# EAGLE board 29_SmartSensor_HW_PGA ver 0.0.1_PGA460 ver 0.0.6 (EAGLE 9.2.0)
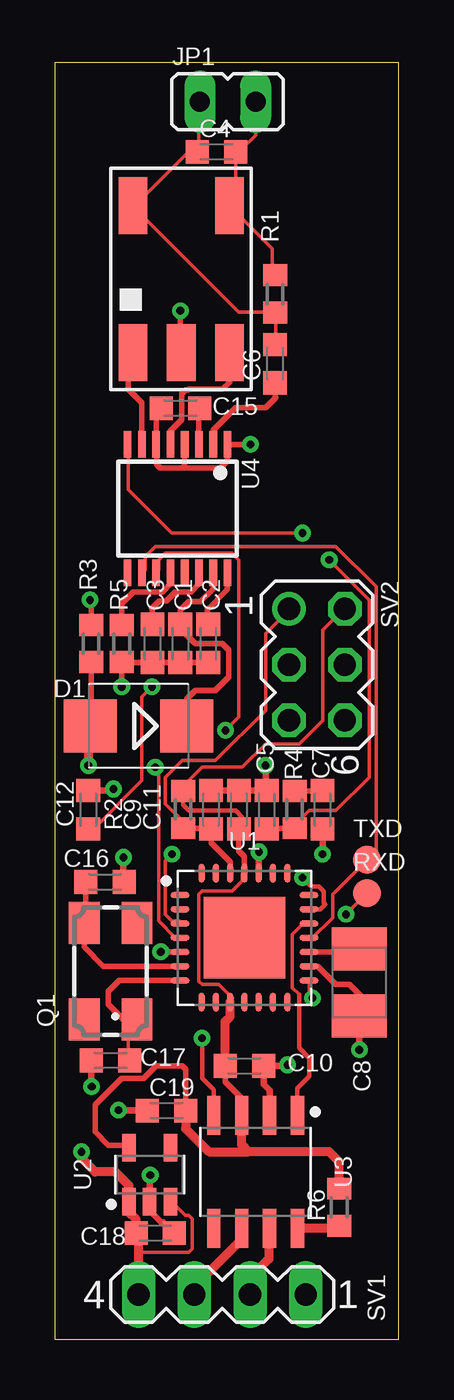
[diagram p0: board, top side]
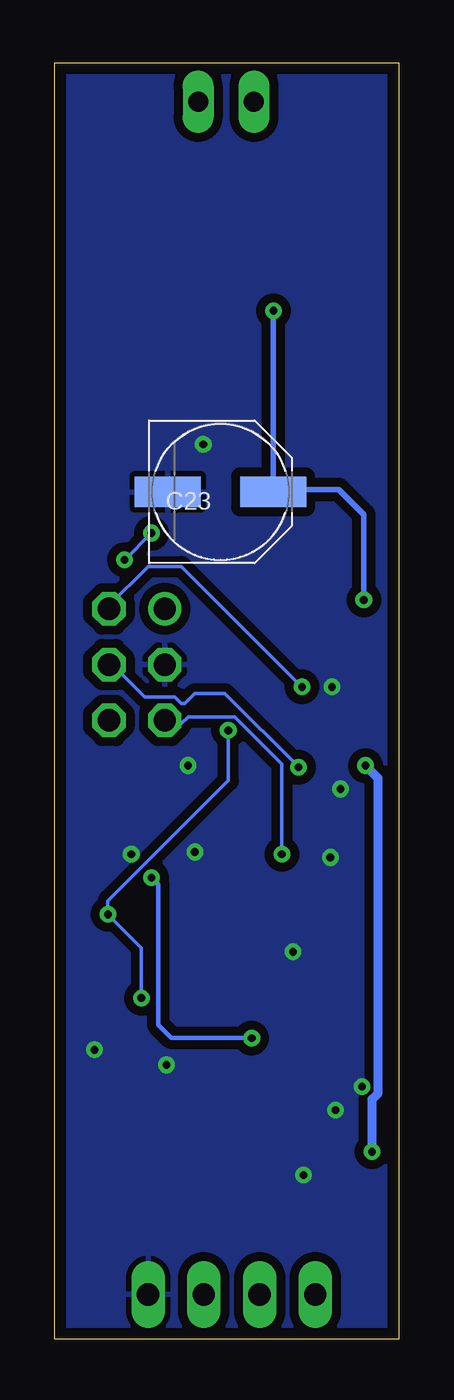
[diagram p1: board, bottom side, seen from below]

Size 15.67 x 58.16 mm. Coordinates in mm from the lower left corner, seen from the top.
Outline: 0,0 15.67,0 15.67,58.16 0,58.16 0,0
Copper layers (1*16): Top 0.035mm / dielectric 1.5mm / Bottom 0.035mm
Design rules "default *": minimum track width 6mil, minimum drill 0.35mm, track to track 6mil, track to pad 6mil, pad to pad 6mil, via to via 6mil, smd to smd 6mil, copper to edge 20mil, drill to drill 6mil, minimum pad ring 10mil, minimum via ring 8mil, stop-mask expansion 4mil, vias tented up to drill 0mil, thermal gap 10mil

## Footprints (pad centres in the part's own frame; a part is rotated, then mirrored left to right if it is on the bottom)
C0603K = smd 1.05 x 1.08: 1 -0.875,0; 2 0.875,0
B/3528-21R = smd 1.95 x 2.5: + 1.525,0; - -1.525,0
PANASONIC_D = smd 3 x 1.4: + 2.4,0; - -2.4,0
SMB = smd 2.4 x 2.4: A 2.2,0; C -2.2,0
JP1 = drill 0.914 long: 1 0,-1.27; 2 0,1.27
CTS406 = smd 1.9 x 1.4: 1 -2.2,-1.2; 2 2.2,-1.2; 3 2.2,1.2; 4 -2.2,1.2
R0603 = smd 1 x 1.1: 1 -0.85,0; 2 0.85,0
B1,27 = smd 1.27 x 1.27: TP 0,0
MA04-1 = drill 1.016 long: 1 -3.81,0; 2 -1.27,0; 3 1.27,0; 4 3.81,0
MA03-2 = drill 1.016: 1 -2.54,-1.27 | drill 1.016 octagon: 2 -2.54,1.27; 3 0,-1.27; 4 0,1.27; 5 2.54,-1.27; 6 2.54,1.27
B78416 = smd 1.3 x 2.6: 1 0,0; 2 2.2,0; 3 4.4,0; 4 4.4,6.7; 6 0,6.7
QFN65P600X600X100-29T370 = smd 0.86 x 0.27: 1 -2.935,1.95; 2 -2.935,1.3; 3 -2.935,0.65; 4 -2.935,0; 5 -2.935,-0.65; 6 -2.935,-1.3; 7 -2.935,-1.95; 15 2.935,-1.95; 16 2.935,-1.3; 17 2.935,-0.65; 18 2.935,0; 19 2.935,0.65; 20 2.935,1.3; 21 2.935,1.95 | smd 0.27 x 0.86: 8 -1.95,-2.935; 9 -1.3,-2.935; 10 -0.65,-2.935; 11 0,-2.935; 12 0.65,-2.935; 13 1.3,-2.935; 14 1.95,-2.935; 22 1.95,2.935; 23 1.3,2.935; 24 0.65,2.935; 25 0,2.935; 26 -0.65,2.935; 27 -1.3,2.935; 28 -1.95,2.935 | smd 3.7 x 3.7: 29 0,0
SOT95P280X110-5 = smd 1.259 x 0.609: 1 -1.228,0.95; 2 -1.228,0; 3 -1.228,-0.95; 4 1.228,-0.95; 5 1.228,0.95
SOIC127P599X265-8 = smd 1.775 x 0.602: 1 -2.565,1.905; 2 -2.565,0.635; 3 -2.565,-0.635; 4 -2.565,-1.905; 5 2.565,-1.905; 6 2.565,-0.635; 7 2.565,0.635; 8 2.565,1.905
TSSOP16 = smd 0.35 x 1.2: 1 -2.275,-2.925; 2 -1.625,-2.925; 3 -0.975,-2.925; 4 -0.325,-2.925; 5 0.325,-2.925; 6 0.975,-2.925; 7 1.625,-2.925; 8 2.275,-2.925; 9 2.275,2.925; 10 1.625,2.925; 11 0.975,2.925; 12 0.325,2.925; 13 -0.325,2.925; 14 -0.975,2.925; 15 -1.625,2.925; 16 -2.275,2.925

## Placement (x,y rotation side)
C1  0.1uF  [C0603K]  5.71,31.7 270 top
C2  0.1uF  [C0603K]  6.99,31.7 270 top
C3  0.1uF  [C0603K]  4.45,31.7 270 top
C4  1500pF  [C0603K]  7.37,54.1 0 top
C5  180pF  [C0603K]  9.65,24.13 90 top
C6  390pF  [C0603K]  10.03,44.45 90 top
C7  180pF  [C0603K]  12.19,24.13 270 top
C8  10uF/16V  [B/3528-21R]  13.87,16.26 90 top
C9  0.1uF  [C0603K]  7.11,24.13 90 top
C10  0.1uF  [C0603K]  8.64,12.45 0 top
C11  0.1uF  [C0603K]  8.38,24.13 90 top
C12  0.1uF  [C0603K]  1.52,24.13 90 top
C15  0.033uF  [C0603K]  5.71,42.42 180 top
C16  18pF  [C0603K]  2.29,20.83 180 top
C17  18pF  [C0603K]  2.54,12.7 0 top
C18  0.1uF  [C0603K]  4.57,4.83 180 top
C19  0.47uF  [C0603K]  5.08,10.41 0 top
C23  [PANASONIC_D]  8.13,38.61 0 bottom
D1  SS14FL  [SMB]  3.81,27.94 180 top
JP1  MA58MF14-7N  [JP1]  7.87,56.39 270 top
Q1  [CTS406]  2.54,16.76 90 top
R1  2K7  [R0603]  10.03,47.62 270 top
R2  15K  [R0603]  5.84,24.13 90 top
R3  100E  [R0603]  1.65,31.7 90 top
R4  100E  [R0603]  10.92,24.13 90 top
R5  10K  [R0603]  3.05,31.7 90 top
R6  15K  [R0603]  12.95,6.01 90 top
RXD  TXD  [B1,27]  14.22,20.32 0 top
SV1  [MA04-1]  7.62,2.03 180 top
SV2  [MA03-2]  11.94,30.73 270 top
T1  [B78416]  3.56,44.96 0 top
TXD  TXD  [B1,27]  14.22,21.84 0 top
U1  [QFN65P600X600X100-29T370]  8.64,18.29 0 top
U2  MIC5203  [SOT95P280X110-5]  4.32,7.49 90 top
U3  [SOIC127P599X265-8]  9.14,7.62 270 top
U4  PGA460  [TSSOP16]  5.59,37.85 180 top

## Library data of the parts
C1-C7 C15 C23 R1 R3-R5 = rcl
C8-C12 C16-C19 = rcl; SPICEPREFIX: C
D1 = diode
JP1 = jumper
Q1 = crystal; OC_FARNELL: unknown; OC_NEWARK: unknown
R2 R6 = rcl; SPICEPREFIX: R
RXD TXD = testpad
SV1 SV2 = con-lstb; OC_FARNELL: unknown; OC_NEWARK: unknown
T1 U1-U3 = CustomMy
U4 = texas

## Nets
/MCLR: C9.1 R2.1 SV2.1 U1.26
CANH: SV1.2 U3.7
CANL: SV1.3 U3.6
CANRX: U1.20 U3.4
CANTX: U1.19 U3.1
GND: C1.2 C2.2 C3.2 C5.2 C7.2 C8.- C9.2 C10.2 C11.2 C12.2 C15.2 C16.1 C17.1 C18.1 C19.1 C23.- R5.1 SV1.1 SV2.3 U1.5 U1.16 U1.24 U2.2 U3.2 U4.1 U4.4 U4.6
ICSPCLK: SV2.5 U1.3
ICSPDAT: SV2.4 U1.4
INN: C15.1 U4.3
INP: C6.1 U4.2
IO: C5.1 R4.1 U4.8
N$1: R5.2 U4.12
N$2: R6.1 U3.8
N$4: C23.+ R3.2 T1.2
N$5: C3.1 U4.14
N$6: C2.1 U4.16
N$7: C4.1 C6.2 JP1.1 R1.2 T1.6
N$8: C1.1 D1.C U4.15
N$9: C4.2 JP1.2 R1.1 T1.4
N$10: C8.+ U1.17
OSC1: C16.2 Q1.3 U1.6
OSC2: C17.2 Q1.1 U1.7
OUTA: T1.3 U4.5
OUTB: T1.1 U4.7
PGM: SV2.6
TCI: C7.1 R4.2
UARTRX: TXD.TP U1.18 U4.10
UARTTX: RXD.TP U1.15 U4.11
VDD: C10.1 C11.1 C12.1 C19.2 R2.2 R6.2 SV2.2 U1.10 U1.25 U2.5 U3.3
VPWR: C18.2 D1.A R3.1 SV1.4 U2.1 U2.3

## Tracks (layer width: path | path; a pad name or v marks a point on that pad's centre or on a via)
/MCLR
  Top 0.152: R2.1 5.79,23.32 5.79,23.62 5.03,24.38 5.03,25.6 5.79,26.36 7.32,26.36 9.6,28.65 9.6,32.16 10.67,33.22 SV2.1
  Top 0.254: U1.26 7.99,21.73 7.11,22.61 C9.1 7.09,23.28 R2.1
CANH
  Top 0.406: U3.7 9.75,5.03 9.75,3.66 8.84,2.74 8.84,2.08 SV1.2
CANL
  Top 0.406: U3.6 8.51,4.55 6.35,2.39 SV1.3
CANRX  (via drill 0.35)
  Top 0.203: U1.20 12.1,19.59 12.32,19.81 12.26,19.88 12.26,20.4 12.03,20.63 11.68,20.63 v11.28,21.03 | U3.4 7.24,11.35 6.71,11.89 v6.71,13.72
  Bottom 0.203: v6.71,13.72 10.36,13.72 10.97,14.33 10.97,20.73 v11.28,21.03
CANTX
  Top 0.152: 11.12,15.7 10.82,16 10.82,18.44 11.28,18.9 11.43,18.9 U1.19 | 11.12,10.21 U3.1
  Top 0.203: 11.12,15.7 11.12,13.26 11.58,12.8 11.58,11.96 11.05,11.43 11.05,10.29 11.12,10.21
GND  (via drill 0.35)
  Top 0.254: U1.5 5.07,17.64 4.95,17.53 4.83,17.65 v4.82,17.65 | C15.2 4.61,42.19 U4.6 4.65,40.74 4.65,39.85 4.8,39.7 5.79,39.7 | U4.4 5.91,39.82 5.79,39.7 | 5.79,39.7 7.54,39.7 7.86,40.02 U4.1 8.76,40.77 v8.91,40.77 | C3.2 C1.2 C2.2 C3.2 | v3.05,29.72 R5.1 3.07,30.82 C3.2 | U1.16 11.97,16.99 12.8,16.15 13.41,16.15 14.02,15.54 13.87,15.39 C8.-
  Top 0.305: C8.- v13.87,13.18 | v10.59,12.5 10.59,12.45 C10.2 9.51,11.6 9.78,11.33 U3.2 | v4.34,7.47 4.32,7.47 U2.2 4.32,5.85 4.84,5.33 4.94,5.33 C18.1 | C17.1 1.67,11.59 1.68,11.58 v1.68,11.51 | C19.1 2.92,10.41 v2.9,10.44 | C16.1 3.12,20.86 v3.12,21.95 | C12.2 2.67,25 v2.67,25.07 | C9.2 C11.2 C5.2 9.6,25.06 v9.6,26.14 | C7.2 v12.19,22.1 | U1.24 9.29,22.09 9.3,22.1 v9.3,22.2
  pour Bottom (isolate 0.406, rank 2): 0.51,57.91 15.24,57.91 15.24,0.25 0.25,0.25 0.25,57.91
ICSPCLK  (via drill 0.35)
  Top 0.152: v5.33,22.1 5.03,21.79 5.03,19.36 5.33,19.05 5.64,19.05 U1.3
  Bottom 0.152: v5.33,22.1 5.33,26.21 7.47,28.35 9.6,28.35 9.91,28.04 10.52,28.04 SV2.5
ICSPDAT  (via drill 0.35)
  Top 0.152: U1.4 5.49,18.29 4.72,19.05 4.72,25.91 v4.57,26.06
  Bottom 0.152: v4.57,26.06 7.92,29.41 9.3,29.41 9.75,28.96 9.91,28.96 10.21,29.26 11.58,29.26 13.11,30.79 SV2.4
INN
  Top 0.254: U4.3 6.56,42.39 C15.1
INP
  Top 0.254: U4.2 7.21,41.43 8.23,42.44 9.6,42.44 10.06,42.9 10.03,42.93 C6.1
IO  (via drill 0.35)
  Top 0.152: v11.28,36.73 7.01,36.73 6.86,36.73 5.33,36.73 3.35,38.71 3.35,40.69 U4.8 | v12.5,35.51 14.33,33.68 14.33,25.6 12.8,24.08 11.58,24.08 10.82,23.32 R4.1
  Top 0.254: C5.1 9.68,23.28 R4.1
  Bottom 0.152: v12.5,35.51 v11.28,36.73
N$1
  Top 0.254: U4.12 5.26,34.4 4.9,34.04 3.56,34.04 3.05,33.53 R5.2
N$2
  Top 0.406: R6.1 12.85,5.05 U3.8
N$4  (via drill 0.35)
  Top 0.254: v5.71,46.86 5.71,45 T1.2 | R3.2 1.65,33.5 1.68,33.53 1.68,33.6 v1.6,33.68
  Bottom 0.254: C23.+ 5.73,38.71 | 5.73,38.71 5.73,46.77 5.71,46.79 v5.71,46.86 | v1.6,33.68 1.6,37.57 2.74,38.71 5.73,38.71
N$5
  Top 0.254: U4.14 6.56,34.4 6.2,34.04 5.48,34.04 5.07,33.63 4.75,33.63 4.42,33.3 4.45,33.27 C3.1
N$6
  Top 0.254: U4.16 7.86,34.15 6.93,33.22 6.93,32.62 C2.1
N$7
  Top 0.152: JP1.1 6.55,56.39 6.55,54.1 C4.1 6.1,54.1 3.66,51.66 T1.6 3.66,51.51 8.38,46.79 9.91,46.79 R1.2 10.06,46.63 10.06,45.41 C6.2
N$8
  Top 0.254: U4.15 7.21,34.19 6.63,33.6 6.1,33.6 5.71,33.22 C1.1 5.71,32.38 6.4,31.7 7.62,31.7 7.92,31.39 7.92,30.18 7.32,29.57 6.4,29.57 6.01,29.18 D1.C
N$9
  Top 0.152: R1.1 9.91,48.62 9.91,49.68 8.08,51.51 T1.4 8.08,51.66 8.23,51.82 C4.2 8.38,54.1 9.14,54.86 JP1.2
N$10
  Top 0.254: U1.17 13.72,17.64 C8.+
OSC1
  Top 0.254: C16.2 1.41,19.04 Q1.3 1.34,17.86 2.21,16.99 U1.6
OSC2
  Top 0.152: C17.2 3.35,12.8 3.35,14.48 Q1.1
  Top 0.254: U1.7 2.93,16.34 2.44,15.85 2.44,15.24 3.11,14.56 Q1.1
OUTA
  Top 0.254: U4.5 5.26,41.38 5.79,41.9 5.79,43.07 5.95,43.24 6.05,43.24 6.1,43.28 7.62,43.28 7.96,43.62 T1.3
OUTB
  Top 0.254: U4.7 3.96,42.67 3.35,43.28 3.35,44.2 3.66,44.5 3.66,44.86 T1.1
TCI
  Top 0.254: R4.2 12.17,24.98 C7.1
UARTRX
  Top 0.152: U1.18 11.73,18.29 12.65,19.2 12.65,20.27 TXD.TP 14.63,22.25 14.63,34.29 12.8,36.12 4.57,36.12 4.12,35.66 4.12,35.05 U4.10
UARTTX  (via drill 0.35)
  Top 0.152: v11.73,15.54 11.58,15.7 11.58,16.31 U1.15 | RXD.TP v13.26,19.36 | v7.77,27.74 8.38,28.35 8.38,35.51 8.08,35.81 5.03,35.81 4.72,35.51 4.72,35.05 U4.11
  Bottom 0.152: v11.73,15.54 11.73,17.83 v13.26,19.36 13.26,19.96 7.77,25.45 v7.77,27.74
VDD  (via drill 0.35)
  Top 0.152: U1.25 8.53,21.18 8.53,20.88 8.08,20.42 6.71,20.42 6.55,20.27 6.55,16.31 6.71,16.15 7.47,16.15 8.08,15.54 U1.10 | v4.42,29.72 3.96,29.26 3.96,25.45 1.83,23.32 1.52,23.32 C12.1 | R2.2 5.94,24.99 5.94,25.3 6.71,26.06 8.53,26.06 9.6,27.13 11.12,27.13 12.19,28.19 12.19,32.31 13.11,33.22 SV2.2
  Top 0.203: R2.2 5.84,24.33 6.1,24.08 8.23,24.08 8.53,23.77 8.38,23.62 C11.1
  Top 0.254: U1.25 8.64,22 8.38,22.25 C11.1 | U3.3 8.51,10.36 8.51,10.97 7.76,11.72 C10.1 | U2.5 3.25,8.84 2.44,8.84 1.83,9.45 1.83,10.67 3.04,11.88 4.06,11.88 4.62,12.45 5.79,12.45 5.96,12.28 C19.2
  Top 0.406: R6.2 12.95,8.08 12.5,8.53 8.84,8.53 | 8.51,10.36 8.51,8.87 8.84,8.53 | C19.2 5.96,9.59 7.01,8.53 8.84,8.53 | C10.1 7.76,14.47 7.99,14.69 U1.10
  Bottom 0.152: v4.42,29.72 9.91,35.2 11.43,35.2 13.26,33.38 SV2.2
VPWR  (via drill 0.35)
  Top 0.152: 3.81,3.96 6.1,3.96 6.25,4.12 6.25,5.49 6.1,5.64 5.94,5.64 5.33,6.25 U2.3
  Top 0.254: R3.1 1.65,27.98 D1.A
  Top 0.406: SV1.4 3.81,3.96 3.81,4.71 C18.2 3.7,5.45 3.35,5.79 3.35,6.25 U2.1 3.37,7 2.74,7.62 1.83,7.62 1.22,8.23 v1.22,8.53 | v1.52,26.14 1.52,27.85 D1.A
  Bottom 0.406: v1.22,8.53 1.22,10.93 0.94,11.2 0.94,25.55 v1.52,26.14